# Altium PCB PCB1.PcbDoc
Units mm, origin at the board's own origin, x right, y up, seen from the top; angles counter-clockwise.
Board outline 97.28 x 72.31 mm, 2 copper layers (Top Layer, Bottom Layer); 65 components, 41 nets, 160 pads, 18 vias.
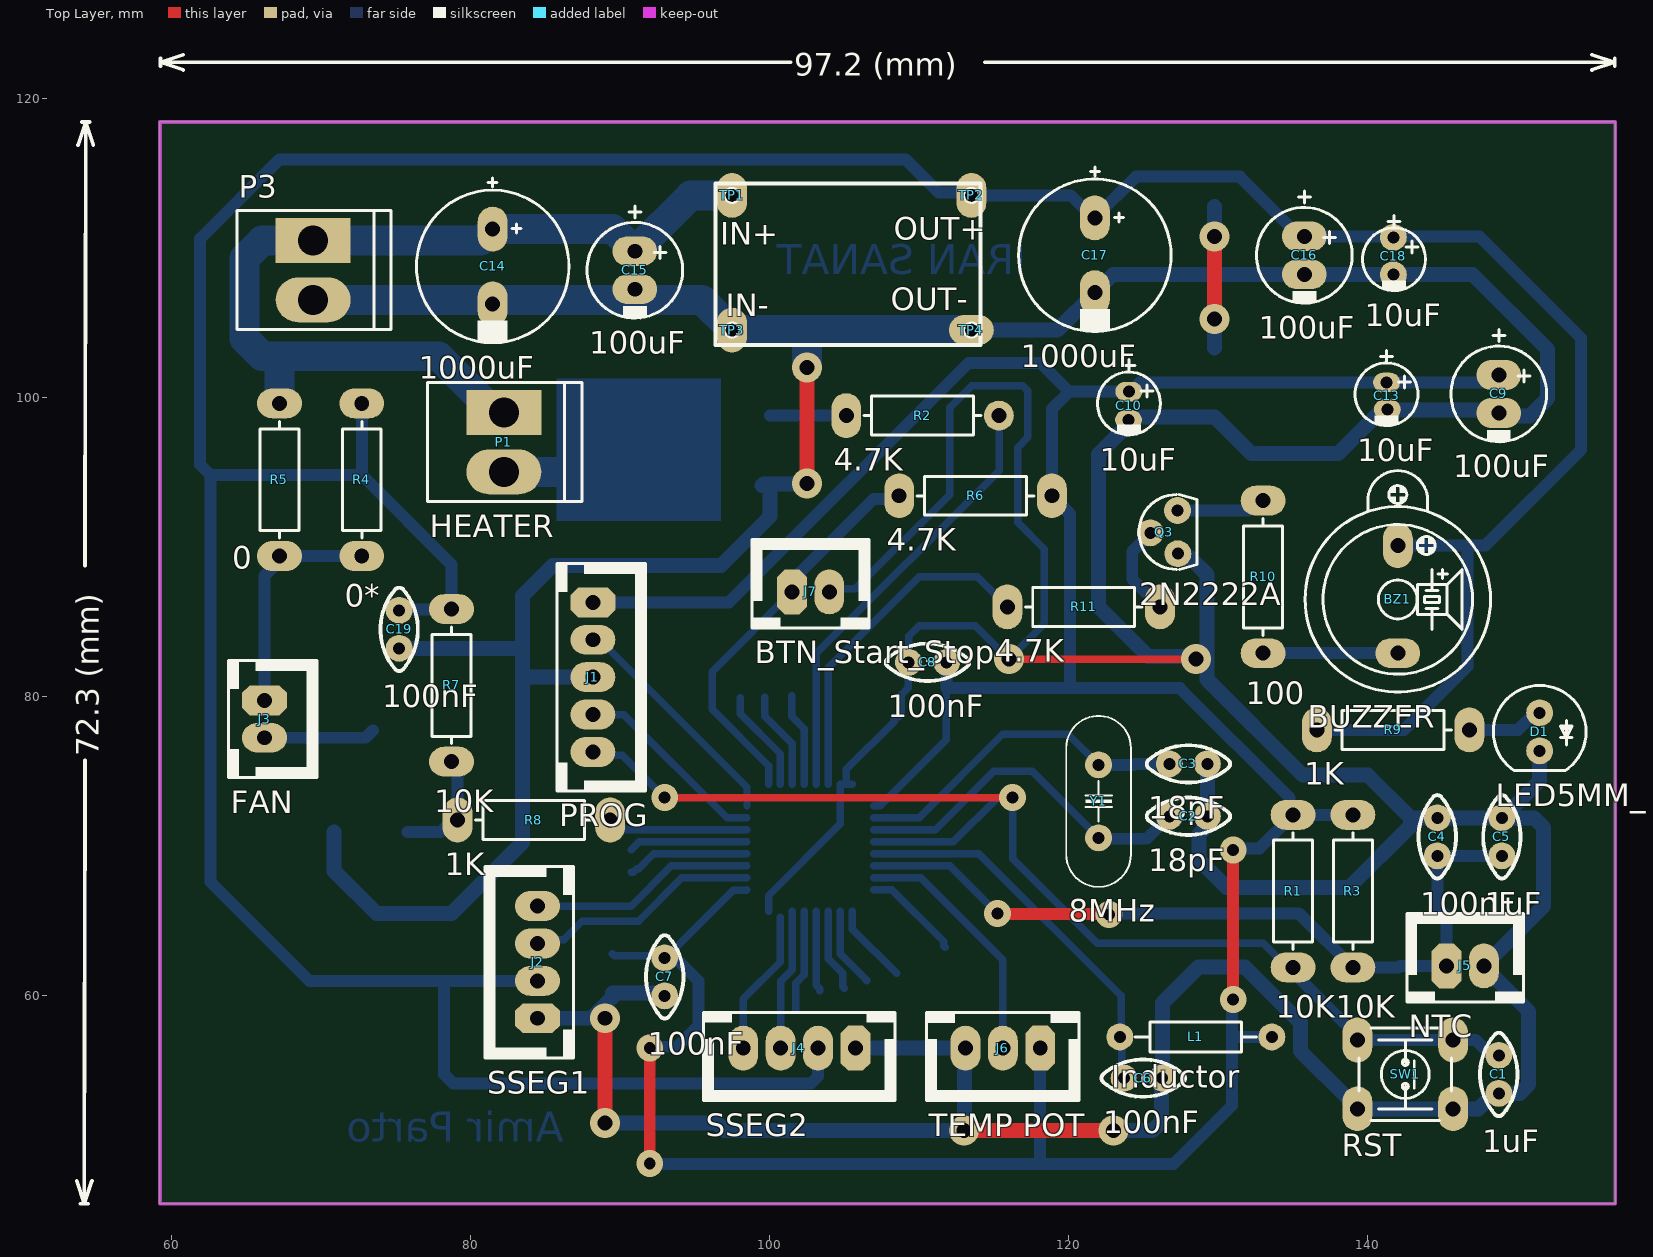
[diagram p0: Top Layer view]
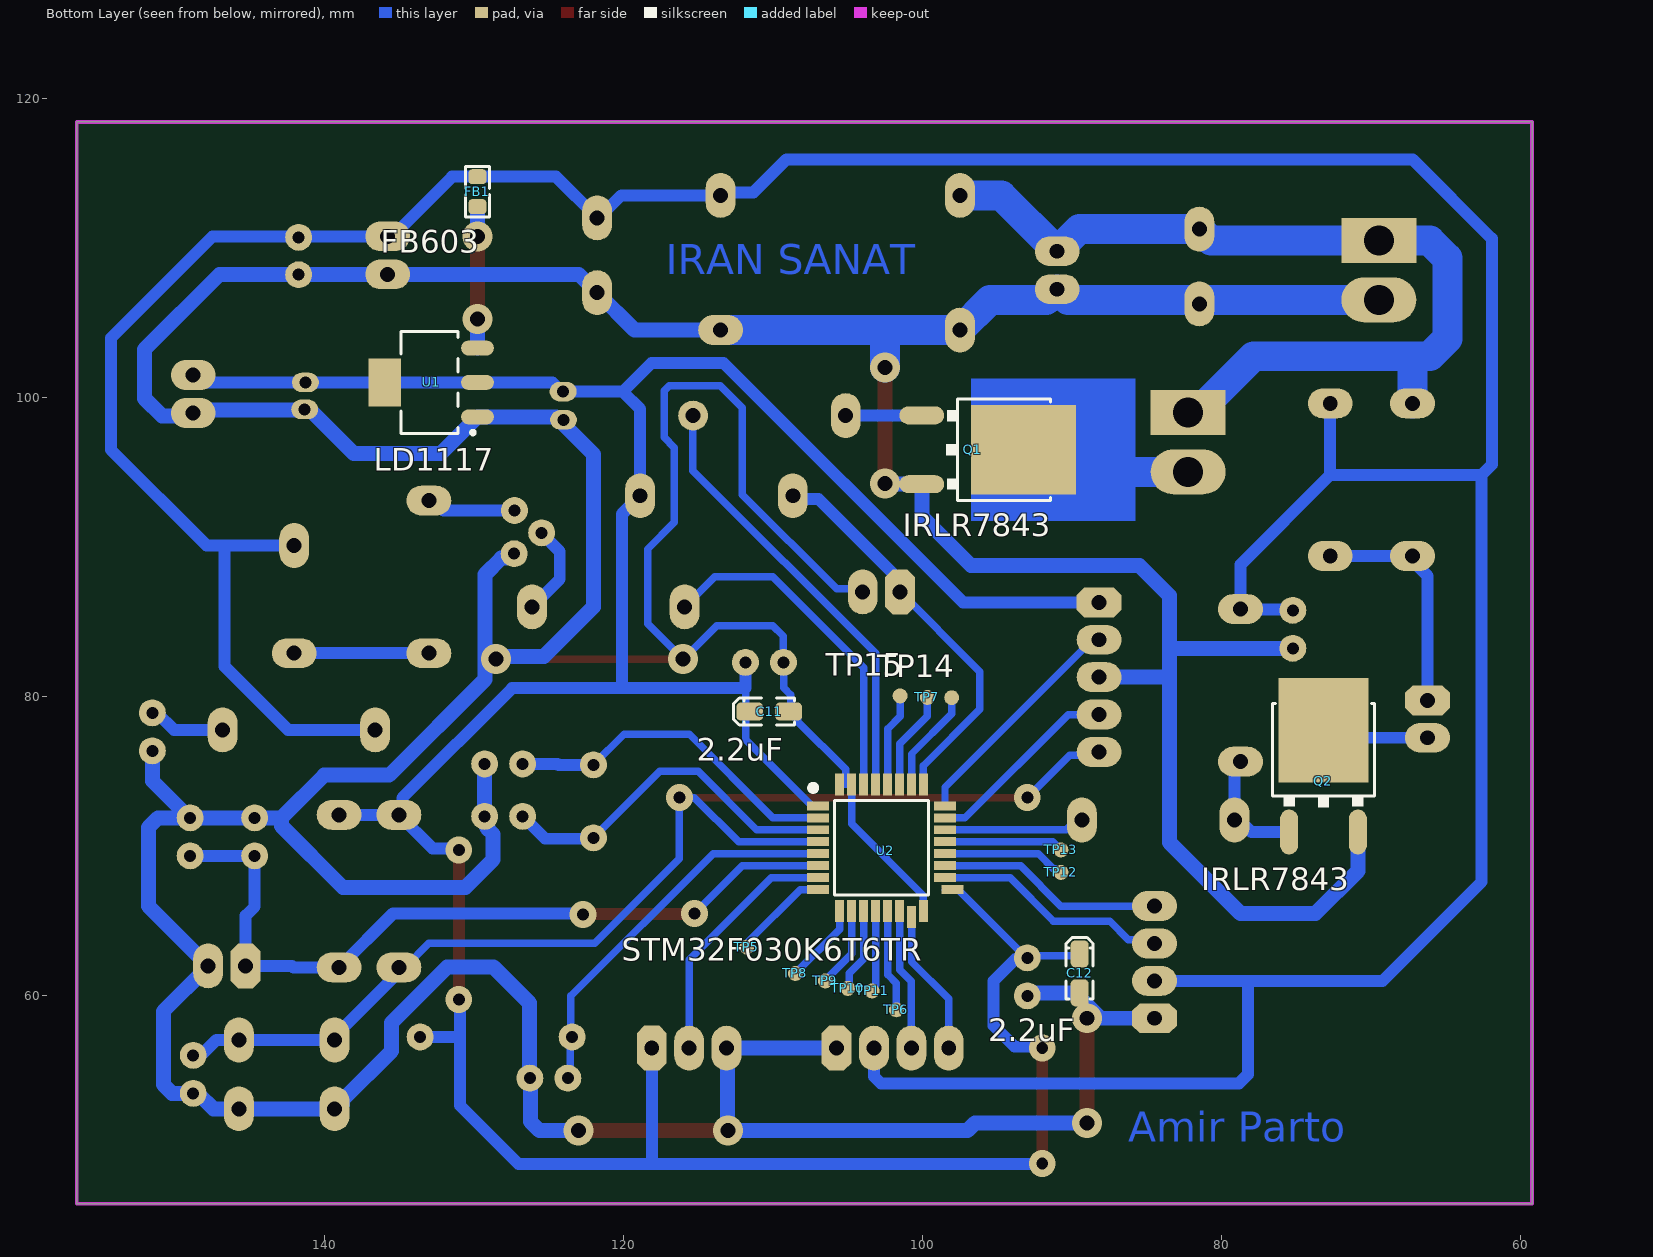
[diagram p1: Bottom Layer view, seen from below]
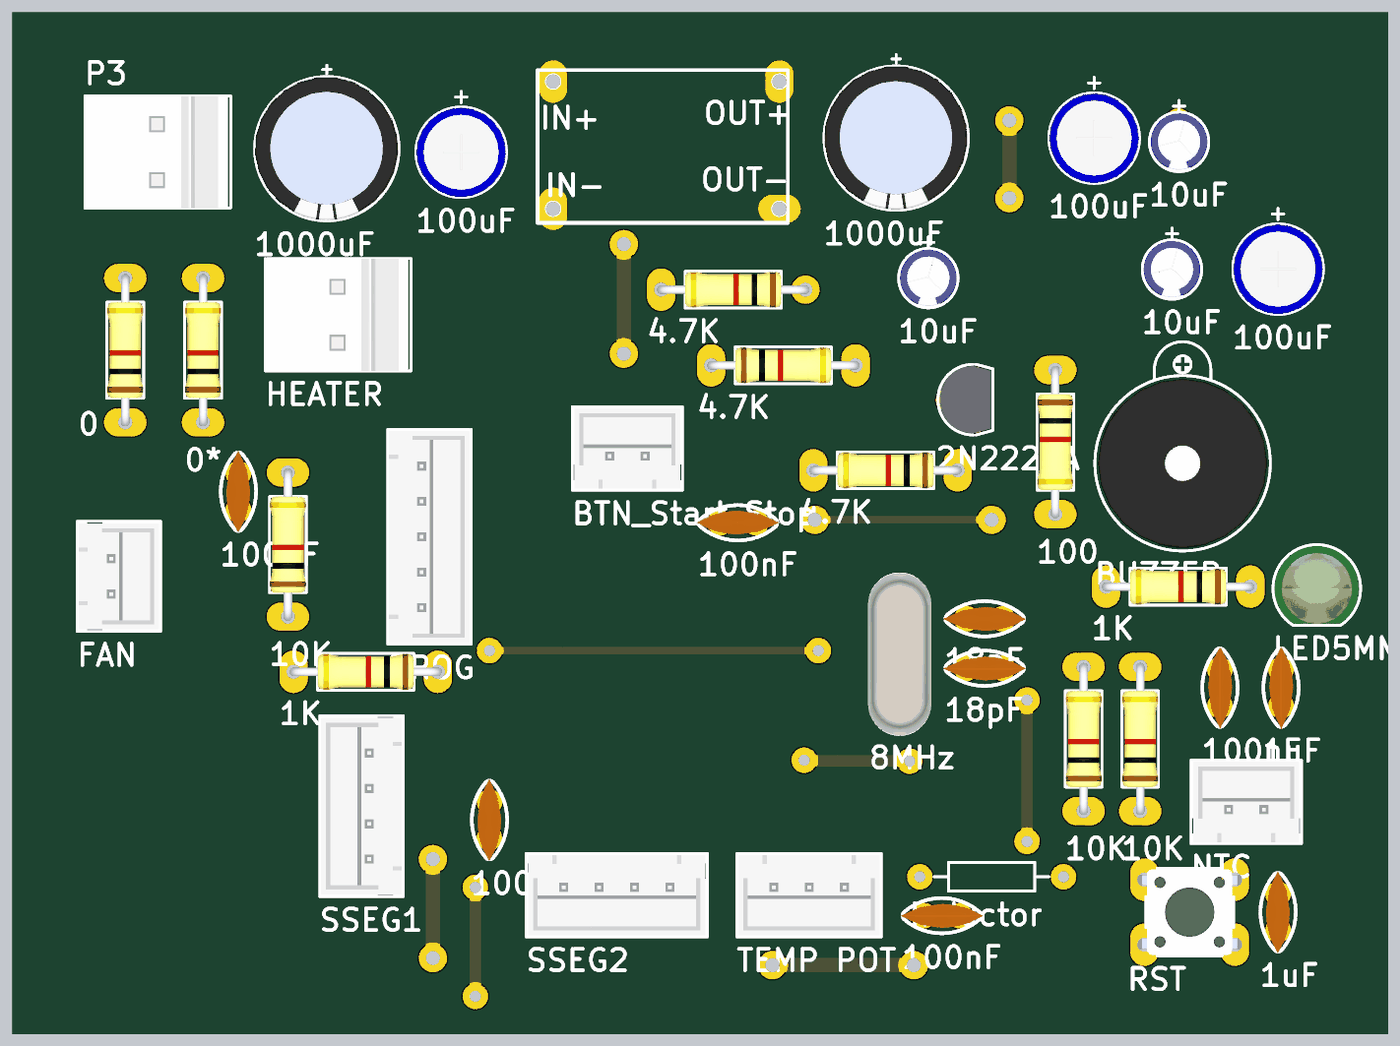
[diagram p2: 3D render of the assembled board from above, using the file's embedded part models]
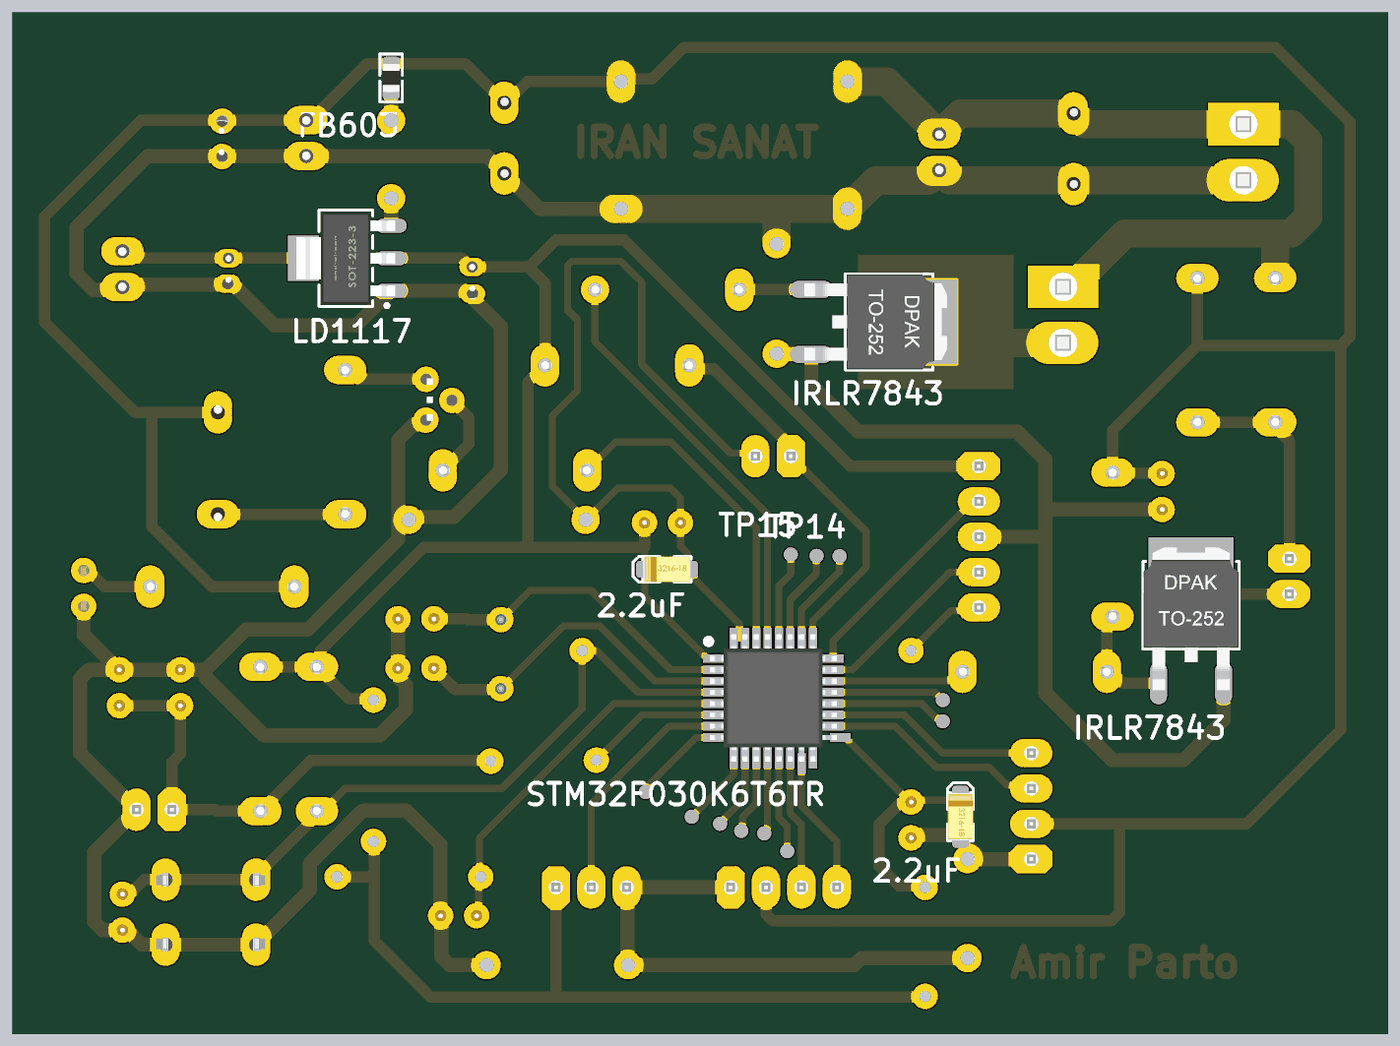
[diagram p3: 3D render of the assembled board from below, using the file's embedded part models]

## Layer stack, top to bottom
Top Solder: solder mask 0.0102, Solder Resist, Dk 3.5
Top Layer: signal copper 0.0356
Dielectric 1: dielectric 0.32, FR-4, Dk 4.8
Bottom Layer: signal copper 0.0356
Bottom Solder: solder mask 0.0102, Solder Resist, Dk 3.5

## Board outline
59.258,46.101 156.54,46.101 156.54,118.415 59.258,118.415

## Design rules (kind name [scope] priority, off if disabled: settings)
Clearance [All] p1: gap=0.4 ignorepadtopadclearanceinfootprint=TRUE except(0.25: Arc-SMDPad Track-SMDPad; 0.3: Arc-Arc Arc-Track Track-Track)
HoleSize [All] p1: absolutevalues=TRUE maxlimit=4 minlimit=0.8 maxpercent=80.000 minpercent=20.000
PolygonConnect [All] p1: connectstyle=Relief reliefconductorwidth=0.254 reliefentries=4 polygonreliefangle="90 Angle" airgapwidth=0.254
RoutingVias [All] p1: holewidth=0.8 width=1.3 viastyle="Through Hole" minholewidth=0.5 minwidth=0.5 maxholewidth=3 maxwidth=5
SolderMaskExpansion [All] p1: expansion=0.102 istentingtop=FALSE
UnRoutedNet [All] p1: checkbadconnections=TRUE
Width [All] p1: maxlimit=6 minlimit=0.254 preferedwidth=0.8 minimp=50.000000 maximp=50.000000 favimp=50.000000
28 further rules are at their usual default settings.

## Components (designator, comment, footprint, x,y, rotation, side; value= is the part's Value field where it differs from the comment)
BZ1 "BUZZER" BZ_C12 142,86.5 r270 top
C1 "1uF" "Cap - 100nF" 148.75,54.75 r270 top
C2 "18pF" "Cap - 100nF" 128,72 r0 top
C3 "18pF" "Cap - 100nF" 128,75.5 r0 top
C4 "100nF" "Cap - 100nF" 144.64,70.624 r90 top
C5 "1uF" "Cap - 100nF" 148.958,70.624 r90 top
C6 "100nF" "Cap - 100nF" 124.98,54.5 r0 top
C7 "100nF" "Cap - 100nF" 93,61.27 r270 top
C8 "100nF" "Cap - 100nF" 110.569,82.29 r180 top
C9 "100uF" C_EL_6X11 148.75,100.23 r270 top
C10 "10uF" C_EL_4X7#1 124.025,99.625 r270 top
C11 "2.2uF" C_TN_3216 110.25,79 r180 bottom
C12 "2.2uF" C_TN_3216 89.5,61.5 r270 bottom
C13 "10uF" C_EL_4X7#2 141.25,100.238 r270 top
C14 "1000uF" C_EL_10X12 81.5,108.75 r270 top
C15 "100uF" C_EL_6X11 91,108.5 r270 top
C16 "100uF" C_EL_6X11 135.75,109.5 r270 top
C17 "1000uF" C_EL_10X12 121.75,109.5 r270 top
C18 "10uF" C_EL_4X7#3 141.75,109.262 r270 top
C19 "100nF" "Cap - 100nF" 75.25,84.5 r270 top
D1 "LED5MM_GRN" LED5MM_GRN 151.486,77.648 r270 top
FB1 "FB603" L0805 129.75,113.75 r270 bottom
J1 "PROG" XH_5 88.2,81.3 r270 top value=XH_5
J2 "SSEG1" XH_4 84.5,62.25 r90 top value=HHDR_4
J3 "FAN" XH_2 66.25,78.5 r270 top value=HHDR_2
J4 "SSEG2" XH_4 102,56.5 r180 top value=HHDR_4
J5 "NTC" XH_2 146.5,62 r0 top value=HHDR_2
J6 "TEMP POT" XH_3 115.6,56.5 r180 top value=HHDR_3
J7 "BTN_Start_Stop" XH_2 102.75,87 r0 top value=HHDR_2
L1 "Inductor" AXIAL-0.4 128.5,57.25 r180 top value=10mH
P1 "HEATER" PWL_2 82.25,97 r270 top value=CONN_PWL_2
P3 "POWER-IN" PWL_2 69.5,108.5 r270 top value=CONN_PWL_2
Q1 "IRLR7843" DPAK_3 100.05,96.5 r270 bottom
Q2 "IRLR7843" DPAK_3 73.2,70.95 r180 bottom
Q3 "2N2222A" TO92_3 127,91 r90 top
R1 "10K" R025W_AX04#1 135,67 r90 top
R2 "4.7K" R025W_AX04#2 110.236,98.781 r180 top
R3 "10K" R025W_AX04#1 139,67 r90 top
R4 "0*" R025W_AX04#1 72.75,94.5 r90 top
R5 "0" R025W_AX04#1 67.25,94.5 r90 top
R6 "4.7K" R025W_AX04#1 113.775,93.425 r0 top
R7 "10K" R025W_AX04#1 78.75,80.75 r90 top
R8 "1K" R025W_AX04#1 84.25,71.75 r180 top
R9 "1K" R025W_AX04#1 141.687,77.775 r180 top
R10 "100" R025W_AX04#1 133,88 r270 top
R11 "4.7K" R025W_AX04#1 121,86 r180 top
SW1 "RST" SWPBT_SPDT_6X6X5 142.5,54.75 r180 top value=PUSHBUTTON
TP1 "IN+" TP80D50#1 97.5,113.5 r90 top value=VALUE
TP2 "OUT+" TP80D50#1 113.5,113.5 r90 top value=VALUE
TP3 "IN-" TP80D50#1 97.5,104.5 r90 top value=VALUE
TP4 "OUT-" TP80D50#2 113.5,104.5 r90 top value=VALUE
TP5 "" TP10 111.75,63.25 r90 bottom
TP6 "" TP10 101.749,59.066 r90 bottom
TP7 "" TP10 99.675,79.95 r90 bottom
TP8 "" TP10 108.5,61.5 r90 bottom
TP9 "" TP10 106.5,61 r90 bottom
TP10 "" TP10 105,60.5 r90 bottom
TP11 "" TP10 103.375,60.325 r90 bottom
TP12 "" TP10 90.75,68.25 r0 bottom
TP13 "" TP10 90.75,69.75 r0 bottom
TP14 "" TP10 98.05,79.925 r90 bottom
TP15 "" TP10 101.5,80.05 r90 bottom
U1 "LD1117" SOT223_4 132.95,101 r0 bottom
U2 "STM32F030K6T6TR" QFP80P900X900X160-32N 102.738,69.9 r180 bottom
Y1 "8MHz" "XTAL Small" 122,73 r90 top

## Footprints (in the part's own frame and the unit in brackets; to place one, negate y for a bottom-side part, rotate by r counter-clockwise, add the part's x,y. Pads: shape width x height; smd on the part's side, far side on the other; paste and mask are expansions set on the pad)
AXIAL-0.4 [mm] "Axial Device, Thru-Hole; 2 Leads; 0.4 in Pin Spacing"
  round 1.8 hole 0.8: 1(-5.08,0) 2(5.08,0)
  silkscreen extent -4.06,-1.02 4.06,1.02
BZ_C12 [mm] "BUZZER 12mm DIA, 8.5mm Height , 7.62mm pitch"
  oval 3x2 hole 1: 1(-3.6,0)
  oval 2x3 hole 1: 2(3.6,0)
  silkscreen extent -8.6,-6.2 6.2,6.2, body extent -6,-6 6,6, height 9.5
C_EL_4X7#1 [mm] "Cap Elec, D4.0X7.0H pitch: 1.5mm"
  oval 1.3x1.8 hole 0.8: 1(-0.762,0) 2(1.125,-0.025)
  silkscreen extent -2.9,-2.1 2.13,2.1, body extent -2,-2 2,2, height 1
C_EL_4X7#2 [mm] "Cap Elec, D4.0X7.0H pitch: 1.5mm"
  oval 1.3x1.8 hole 0.8: 1(-0.762,0) 2(1.038,0.05)
  silkscreen extent -2.9,-2.1 2.13,2.1, body extent -2,-2 2,2, height 1
C_EL_4X7#3 [mm] "Cap Elec, D4.0X7.0H pitch: 1.5mm"
  round 1.8 hole 0.8: 1(-1.438,-0.05) 2(1.062,-0.05)
  silkscreen extent -2.9,-2.1 2.13,2.1, body extent -2,-2 2,2, height 1
C_EL_6X11 [mm] "Cap Elec, D6.3X11.0H pitch: 2.5mm"
  oval 2x3 hole 1: 1(-1.27,0) 2(1.27,0)
  silkscreen extent -4.3,-3.2 3.2,3.2, body extent -3.17,-3.18 3.18,3.18, height 2.51
C_EL_10X12 [mm] "Cap Elec, D10.0X12.0H pitch: 5.0mm"
  oval 3x2 hole 1: 1(-2.5,0) 2(2.5,0)
  silkscreen extent -5.9,-5.1 5.1,5.1, body extent -5.07,-5.08 5.05,5.04, height 13.7
C_TN_3216 [mm] "CAPACITOR, TAN A, 1206P, 3.2x1.6mm"
  rrect50% 1.8x1.2 smd mask+0.075: 1(-1.3,0) 2(1.3,0)
  Top Layer pour cut-out: -0.762,0.9 0.762,0.9 0.762,-0.9 -0.762,-0.9
  silkscreen extent -2.4,-0.9 1.7,0.9, body extent -1.7,-0.9 1.7,0.9, height 1.7
"Cap - 100nF" [mm]
  round 1.8 hole 0.8: 1(-1.27,0) 2(1.27,0)
  silkscreen extent -2.78,-1.25 2.79,1.25, body extent -2.92,-0.86 2.92,0.83, height 6.92
DPAK_3 [mm] "D-PAK (TO-252), 3-Pads, Body 6.2x6.7mm"
  oval 1.2x3 smd: 1(-2.3,0) 3(2.3,0)
  rect 6x7 smd: 4(0,6.8)
  silkscreen extent -3.4,1.63 3.4,8.6, body extent -3.37,-0.5 3.37,9.6, height 2.37
L0805 [mm] "INDUCTOR, FERRITE BEAD, 0805, 2.0X1.3mm"
  rrect50% 1x1.2 smd mask+0.075: 1(-1,0) 2(1,0)
  Top Layer pour cut-out: -0.5,0.8 0.5,0.8 0.5,-0.8 -0.5,-0.8
  silkscreen extent -1.7,-0.8 1.7,0.8, body extent -1,-0.6 1,0.6, height 0.95
LED5MM_GRN [mm] "LED THD 5MM GREEN"
  round 1.8 hole 0.8: 1(-1.27,0) 2(1.27,0)
  silkscreen extent -3.1,-3.1 2.6,3.1, body extent -3,-3 2.5,3, height 9.14
PWL_2 [mm] "Connector; Header; 2 Position"
  rect 3x5 hole 2: 1(-1.98,0)
  oval 3x5 hole 2: 2(1.98,0)
  silkscreen extent -3.98,-5.1 3.96,5.21, body extent -3.96,-5 3.96,5, height 13.5
QFP80P900X900X160-32N [mm]
  rect 1.475x0.6 smd: 1(-4.238,2.8) 2(-4.238,2) 3(-4.238,1.2) 4(-4.238,0.4) 5(-4.238,-0.4) 6(-4.238,-1.2) 7(-4.238,-2) 8(-4.238,-2.8) 17(4.738,-2.8) 18(4.238,-2) 19(4.238,-1.2) 20(4.238,-0.4) 21(4.238,0.4) 22(4.238,1.2) 23(4.238,2) 24(4.238,2.8)
  rect 0.6x1.475 smd: 9(-2.8,-4.238) 10(-2,-4.238) 11(-1.2,-4.238) 12(-0.4,-4.238) 13(0.4,-4.238) 14(1.2,-4.238) 15(2,-4.636) 16(2.8,-4.238) 25(2.8,4.238) 26(2,4.238) 27(1.2,4.238) 28(0.4,4.238) 29(-0.4,4.238) 30(-1.2,4.238) 31(-2,4.238) 32(-2.8,4.238)
  silkscreen extent -4.77,-3.15 3.15,4.2, body extent -4.5,-4.5 4.5,4.5, height 1.6
R025W_AX04#1 [mm] "RESISTOR 1/4 WATT, AXIAL0.4"
  oval 2x3 hole 1: 1(-5.1,0) 2(5.1,0)
  silkscreen extent -3.9,-1.3 3.9,1.3, body extent -5.38,-1.28 5.38,1.28, height 2.6
R025W_AX04#2 [mm] "RESISTOR 1/4 WATT, AXIAL0.4"
  round 2 hole 1: 1(-5.1,0)
  oval 2x3 hole 1: 2(5.1,0)
  silkscreen extent -3.9,-1.3 3.9,1.3, body extent -5.38,-1.28 5.38,1.28, height 2.6
SOT223_4 [mm] "SOT223, 4-Leads, Body 6.5x3.5mm, Pitch 2.30mm"
  oval 2.2x1 smd: 1(-3.2,2.3) 2(-3.2,0) 3(-3.2,-2.3)
  rect 2.2x3.2 smd: 4(3,0)
  Top Layer pour cut-out: -1.7,3.556 1.7,3.556 1.7,-3.556 -1.7,-3.556
  silkscreen extent -3.02,-3.4 1.9,3.47, body extent -3.5,-3.25 3.5,3.25, height 1.7
SWPBT_SPDT_6X6X5 [mm] "SWITCH, PUSHBUTTON, THD, SPDT, 6X6mm"
  oval 2x3 hole 1 mask+0.1: 1(-3.2,2.3) 2(-3.2,-2.3) 3(3.2,-2.3) 4(3.2,2.3)
  silkscreen extent -3.1,-3.1 3.1,3.1, body extent -3.87,-3.01 3.87,3.02, height 5.01
TO92_3 [mm] "TO-92, SOT54"
  round 1.8 hole 0.8 mask+0.1: 1(-1.449,-0.298) 2(-0.053,1.543) 3(1.44,-0.277)
  silkscreen extent -2.5,-1.59 2.5,2.3, body extent -2.38,-1.45 2.38,2.18, height 4.82
TP10 [mm] "Round SMD Test Pin; 1.0 mm"
  round 1 smd: 1(0,0)
TP80D50#1 [mm]
  oval 3x2 hole 1 mask+0.025: 1(0,0)
  silkscreen extent -0.5,-0.5 0.5,0.5
TP80D50#2 [mm]
  oval 2x3 hole 1 mask+0.025: 1(0,0)
  silkscreen extent -0.5,-0.5 0.5,0.5
XH_2 [mm] "PW10-xx-M, JST-BxB-XH-A pitch: 2.5mm"
  oct 2x3 hole 1: 1(-1.25,0)
  oval 2x3 hole 1: 2(1.25,0)
  silkscreen extent -3.9,-2.4 3.9,3.5, body extent -3.75,-2.3 3.75,3.4, height 7
XH_3 [mm] "PW10-xx-M, JST-BxB-XH-A pitch: 2.5mm"
  oct 2x3 hole 1: 1(-2.5,0)
  oval 2x3 hole 1: 2(0,0) 3(2.5,0)
  silkscreen extent -5.1,-2.4 5.1,3.5, body extent -5,-2.3 5,3.4, height 7
XH_4 [mm] "PW10-xx-M, JST-BxB-XH-A pitch: 2.5mm"
  oct 2x3 hole 1: 1(-3.75,0)
  oval 2x3 hole 1: 2(-1.25,0) 3(1.25,0) 4(3.75,0)
  silkscreen extent -6.4,-2.4 6.4,3.5, body extent -6.25,-2.3 6.25,3.4, height 7
XH_5 [mm] "PW10-xx-M, JST-BxB-XH-A pitch: 2.5mm"
  oct 2x3 hole 1: 1(-5,0)
  oval 2x3 hole 1: 2(-2.5,0) 3(0,0) 4(2.5,0) 5(5,0)
  silkscreen extent -7.6,-2.4 7.6,3.5, body extent -7.5,-2.3 7.5,3.4, height 7
"XTAL Small" [mm]
  round 1.8 hole 0.8: 1(-2.44,0) 2(2.44,0)
  silkscreen extent -5.71,-2.16 5.71,2.16, body extent -5.75,-2.25 5.75,2.25, height 3.56

## Part data
BZ1: library part BUZZER_C12, "Buzzer, 12X8.5mm, Magnetic Transducer", MANF="Buerklin, CUI", MANF_P#="CM12P, MT03-H1BHP, BMT1205XH7.5, CEM-1201(50)", PARAM="2048 ±200 Hz", PARAM2=3~7VCC, PRICE=PRICE
C1 C2 C3 C4 C5 C6 C7 C8 C19: library part Cap-Bipolar, "Bipolar Capacitor", Voltage=100V, Adding Date=1387/12/20, Designer="Saeid Jorablo", Organazation=ControTec
C9 C15 C16: library part CAP_THD_EL, "CAP, THD, ELEC,", ASSEMBLY=ASSEMBLY, DESC=DESCRIPTION, DIST#=MOUSER, MANF=MANF, MANF_P#=MANF_PART#, PARAM=20%, PARAM2=25V, PRICE="10= 5$"
C10 C13 C18: library part CAP_THD_EL_4X7, "CAP, THD, ELEC,", ASSEMBLY=ASSEMBLY, DESC=DESCRIPTION, DIST#=MOUSER, MANF=MANF, MANF_P#=MANF_PART#, PARAM=20%, PARAM2=25V, PRICE="10= 5$"
C11 C12: library part CAP_SMD_TAN, "CAP, SMD, TAN,", PARAM2=-V
C14 C17: library part CAP_THD_EL_10X12, "CAP, THD, ELEC,", ASSEMBLY=ASSEMBLY, DESC=DESCRIPTION, DIST#=MOUSER, MANF=MANF, MANF_P#=MANF_PART#, PARAM=20%, PARAM2=25V, PRICE="10= 5$"
D1: library part LED_THD_5MM_GRN, "LED, THD, 5MM, GREEN", ASSEMBLY=ASSEMBLY, DESC=DESCRIPTION, MANF=MANF, MANF_P#=MANF_PART#, PARAM2=2.2V, PRICE=PRICE
FB1: library part FBEAD_SMD, "FERRITE_Bead, SMD", MANF=MURATA, MANF_P#=BLM15AG121SN1D, PARAM=120@100MHz, PARAM2=1A
J1: library part XH_5, "JST-XH pitch: 2.5mm", MANF=JST, MANF_P#=JST-B5B-XHA
J2 J4: library part XH_4, "JST-XH pitch: 2.5mm"
J3 J5 J7: library part XH_2, "JST-XH pitch: 2.5mm"
J6: library part XH_3, "JST-XH pitch: 2.5mm"
P1 P3: library part CONN_PWL_2, "Power Terminal 2pin,Header, 2-Pin"
Q1 Q2: library part MOSN_IRLR7843_DPAK, "HEXFET Power MOSFET", ASSEMBLY=ASSEMBLY, MANF_P#=IRLR7843
Q3: library part NPN_2N2222A_TO92, "BJT, NPN, 40v, 0.6A, THD, TO92", MANF=DIOTEC, MANF_P#=2N2222A, PARAM="0.6A, hFE100~300", PARAM2="40v, 625mW"
R1 R2 R3 R4 R5 R6 R7 R8 R9 R10 R11: library part RES_THD, "RESISTOR, THD", ASSEMBLY=ASSEMBLY, DESC=DESCRIPTION, DIST#=MOUSER, MANF="KOA SPEER", MANF_P#=RK73H1ETTP4701F, PARAM=0.063W, PARAM2=1%, PRICE="100= 0.5$"
SW1: library part SWPBT_SPDT_6X6X5, "SWITCH, PUSH BUTTON, TACTILE, THD, SPDT, 4X4MM", ASSEMBLY=ASSEMBLY, DESC=DESCRIPTION, MANF=-, MANF_P#=-, PARAM=PARAM, PRICE=PRICE
TP1 TP2 TP3 TP4: library part TESTPOINT_PROBE, "TEST POINT", MANF=MANF, MANF_P#=MANF_P#
TP5 TP6 TP7 TP8 TP9 TP10 TP11 TP12 TP13 TP14 TP15: library part "Test Point", "Test Point", Category=MISC, Company="SJ Libraries", ComponentLink1Description=Datasheet, Designer="Eng. Saeid Jorablo", HelpURL=http://s3.picofile.com/file/7443264187/Coming_Soon_logo.gif, Mounting Technology="Surface Mount\Through-Hole", Pin Count=0, Update Date=6/3/2012
U1: library part VREG_1117_SOT223, "REG, Linear, LDO1V, 0.8A, SOT-223", MANF="TI, ON, ST", MANF_P#="LD1117, LM1117, AMS1117, TLV1117, REG1117, NCP1117, LT1117, SPX1117", PARAM="LDO1V, 0.8A", PARAM2=1.2/1.5/1.8/2.5/2.85/3.3/5V
U2: "Integrated Circuit", Manufacturer_Name=STMicroelectronics, Mouser Part Number=511-STM32F030K6T6TR, Arrow Part Number=STM32F030K6T6TR, Arrow Price/Stock=https://www.arrow.com/en/products/stm32f030k6t6tr/stmicroelectronics, Datasheet Link=http://www.st.com/content/ccc/resource/technical/document/datasheet/a4/5d/0b/0e/87/c4/4d/71/DM00088500.pdf/files/DM00088500.pdf/jcr:content/translations/en.DM00088500.pdf, Height=1.6mm, Manufacturer_Part_Number=STM32F030K6T6TR, Mouser Price/Stock=https://www.mouser.co.uk/ProductDetail/STMicroelectronics/STM32F030K6T6TR?qs=9MuLHSklicort60U4QZudQ%3D%3D
Y1: library part XTAL, "XTAL Crystal", Company=E.P.I.L, Design Date=11/04/2011
L1: Code_IEC=1005, Code_JEITA=0402, LatestRevisionDate=29-May-2009, LatestRevisionNote="IPC-7351 Footprint Added.", PackageDescription="Chip Inductor", PackageReference=0402-A, Published=8-Jun-2000, Publisher="Altium Limited"

## Via types
v1: diameter 2, hole 1, Top Layer to Bottom Layer, 10 vias
v2: diameter 1.8, hole 0.8, Top Layer to Bottom Layer, 8 vias

## Nets (pads, with @x,y where several pads share a name; then routed paths per layer and width w, separated by ;. In a path a pad name is that pad's centre, name@x,y a point inside that pad or via, vN(x,y) a via of type N, cw(c..) or ccw(c..) an arc to the next point about the centre after c; other vN are vias at no path point)
+3.3V: C7.1 C8.1 C9.1 C10.1 C11.1 C12.1 C13.1 J1.1 J6.1 L1.1 R1.2 R3.2 R6.2 U1.2 U1.4 U2.1 U2.17 | length 234.3
  Top Layer w0.8: v2(91.999,48.793) v2(92,56.5) ; v2(131,59.75) v2(131,69.75)
  Bottom Layer w0.5: C12.1 89.63,62.67 92.87,62.67 C7.1 ; C7.1@93.064,62.54 97.574,67.05 98.45,67.05 U2.17@98.5,67.1 ; U2.1 107.414,72.7 111.825,77.111 111.825,79 111.825,80.475 111.875,80.525 ; C8.1@111.819,82.29 C8.1@111.819,82.779
  Bottom Layer w0.8: J1.1 97.3,86.3 113.311,102.311 118.11,102.311 120.034,100.387 ; v2(91.999,48.793) 92.042,48.75 118.25,48.75 ; v2(92,56.5) 92.096,56.596 93.846,56.596 95.25,58 95.25,61 93.8,62.45 93.09,62.45 C7.1 ; 111.839,80.561 C8.1 ; 111.875,80.525 111.912,80.562 120.091,80.562 ; J6.1 118.1,48.9 118.25,48.75 ; v2(131,59.75) 130.93,59.68 130.93,57.25 ; v2(131,69.75) 131.096,69.846 132.746,69.846 R1.2 ; L1.1 130.93,57.25 ; R3.2 R1.2 ; C9.1 148.425,101.5 147.925,101 C13.1 U1.4 U1.2 124.746,101 124.133,100.387 C10.1 120.034,100.387 ; 118.25,48.75 127,48.75 130.93,52.68 130.93,57.25 ; 120.034,100.387 118.875,99.228 R6.2 120.091,92.209 120.091,80.562 ; 120.091,80.562 127.438,80.562 134.77,73.23 134.77,72.33 R1.2
+5V: BZ1.1 C16.1 C17.1 C18.1 C19.1 FB1.1 J2.2 J4.2 R4.2 R7.2 R9.2 TP2.1 | length 275
  Bottom Layer w0.8: R4.2 72.75,94.825 ; C19.1 75.29,85.81 78.71,85.81 R7.2 78.75,88.825 72.75,94.825 ; J2.2 78.25,61 ; J4.2 103.25,54.621 102.781,54.153 78.847,54.153 78.25,54.75 78.25,61 ; C16.1@135.425,110.77 131.445,114.75 124.5,114.75 C17.1 121.639,112 120.139,113.5 TP2.1 113.3,113.7 111.3,113.7 109.1,115.9 67.234,115.9 61.951,110.617 61.951,95.499 62.625,94.825 ; C16.1 147.446,110.77 154.25,103.966 154.25,96.5 147.85,90.1 146.66,90.1 ; R9.2 142.418,77.775 146.66,82.017 146.66,90.1 ; BZ1.1 146.66,90.1 ; 62.625,94.825 72.75,94.825 ; 62.625,94.825 62.625,67.625 69.25,61 78.25,61
+12V: C14.1 C15.1 P1.1 P3.1 R5.2 TP1.1 | length 63.6
  Bottom Layer w2: R5.2 67.25,102.5 67.5,102.75 ; P1.1 81.65,98.98 77.88,102.75 67.5,102.75 ; TP1.1 94.73,113.5 C15.1 89.52,111.25 C14.1 80.73,110.48 66.094,110.48 64.922,109.308 64.922,103.922 66.094,102.75 67.5,102.75
BTN_Start_Stop: J7.1 R6.1 U2.25 | length 27.2
  Bottom Layer w0.5: U2.25 99.938,75.387 96.175,79.15 96.175,81.675 J7.1@101.7,87.2
  Bottom Layer w0.8: J7.1 101.834,87.334 101.834,88.084 106.945,93.195 108.445,93.195 R6.1
Buzzer: R11.2 U2.30 | length 23.1
  Bottom Layer w0.5: U2.30 103.938,81.938 110,88 113.9,88 R11.2
FAN: R8.1 U2.22 | length 9.4
  Bottom Layer w0.5: R8.1 89.756,71.75 90.406,71.1 U2.22
GND: C1.2 C2.2 C3.2 C4.2 C5.2 C6.2 C7.2 C8.2 C9.2 C10.2 C11.2 C12.2 C13.2 C14.2 C15.2 C16.2 C17.2 C18.2 C19.2 D1.2 J1.3 J2.1 J4.1 J5.2 J6.3 J7.2 P3.2 Q1.3 Q2.3 Q3.1 SW1.1 SW1.4 TP3.1 TP4.1 U1.1 U2.16 U2.31 U2.32 | length 504.2
  Top Layer w0.5: v1(116,82.5) v1(128.5,82.5)
  Top Layer w1: v1(89,51.5) v1(89,58.5) ; v1(102.5,94.25) v1(102.5,102) ; v1(113,51) v1(123,51)
  Bottom Layer w0.5: U2.16 99.938,66.688 104.738,71.488 U2.31 105.138,74.138 ; J7.2 104.208,87.208 105.75,87.208 112.039,93.497 112.039,99.314 113.513,100.787 116.942,100.787 117.272,100.457 117.272,97.333 116.586,96.647 116.586,91.643 118.364,89.865 118.364,84.864 v1(116,82.5) 113.75,84.75 110,84.75 109.299,84.049 C8.2 ; U2.32 105.138,74.138 ; C8.2@109.29,82.29 109.29,80.592 108.807,80.109 108.807,78.807 108.656,78.656 108.333,78.656 108.331,78.654 108.331,78.331 105.138,75.138 105.138,74.138 ; v1(128.5,82.5) v1@129,83
  Bottom Layer w1: Q2.3 70.9,68.35 73.75,65.5 78.75,65.5 83.5,70.25 83.5,81.3 ; C19.2 83.5,83.23 ; J2.1 88.1,58.5 89.5,59.9 C12.2 92.663,60.2 92.863,60 C7.2 ; J1.3 83.5,81.3 ; v1(89,51.5) 96.5,51.5 97,51 v1(113,51) 113.05,51.05 113.05,56.45 J6.3 J4.1 ; v1(102.5,94.25) 102.475,94.225 100.075,94.225 Q1.3 99.592,94.2 99.5,94.108 100.05,94.108 100.05,92.05 96.75,88.75 85.5,88.75 83.5,86.75 83.5,83.23 ; TP4.1 119.25,104.5 C17.2 122.98,108.23 C16.2 146.98,108.23 152,103.21 152,99.922 150.828,98.75 148.96,98.75 C9.2 148.567,99.143 141.357,99.143 C13.2 140.974,99.2 138.02,96.246 132.204,96.246 U1.1 124.5,98.7 122,96.2 122,86 125.309,82.691 v1@128.229,82.691 ; v1(123,51) 125.613,51 126.198,51.586 126.198,54.448 C6.2 ; C6.2@126.27,54.5 126.27,59.52 128.675,61.925 131.775,61.925 135.5,58.2 135.5,56.3 138.785,53.015 138.785,52.727 SW1.4@139.012,52.5 ; Q3.1 127.583,89.551 127.884,89.25 128.164,89.25 129.25,88.164 v1@129.25,83 ; v1@128.5,83 v1@129.25,83 ; C2.2@129.27,71.784 C3.2 ; C2.2 129.117,71.847 129.117,71.217 128.7,70.8 128.7,69.108 130.558,67.25 138.75,67.25 142.856,71.356 142.856,71.894 ; SW1.4 SW1.1 147.398,52.45 148.376,53.428 148.698,53.428 C1.2 150.164,53.48 150.75,54.066 150.75,58.964 147.75,61.964 J5.2 151.75,66 151.75,71.25 151.106,71.894 C5.2@149.008,71.894 ; D1.2 151.486,74.372 C5.2@149.008,71.894 ; 83.5,81.3 83.5,83.23 ; v1@129.25,83 129.25,81.15 135.65,74.75 140,74.75 142.856,71.894 ; 142.856,71.894 C4.2 C5.2 C5.2@149.008,71.894
  Bottom Layer w2: P3.2 90.29,106.52 C15.2 91.73,106.5 95.5,106.5 TP3.1 102.5,104.5 ; v1(102.5,102) 102.5,104.5 ; TP4.1 102.5,104.5
Heater: R2.1 U2.29 | length 29.9
  Bottom Layer w0.5: U2.29 103.138,82.888 115.35,95.1 R2.1@115.35,99
NetBZ1_2: BZ1.2 R10.2 | length 9.2
  Bottom Layer w0.8: R10.2 141.175,82.9 141.675,82.4 BZ1.2@142,82.4
NetC2_1: C2.1 U2.3 Y1.1 | length 23.9
  Bottom Layer w0.5: U2.3 111.1,71.1 115,75 117.56,75 Y1.1@122,70.56
  Bottom Layer w0.8: Y1.1 122.06,70.5 125.23,70.5 C2.1
NetC3_1: C3.1 U2.2 Y1.2 | length 23
  Bottom Layer w0.5: U2.2 110,71.9 115.6,77.5 119.94,77.5 Y1.2
  Bottom Layer w0.8: Y1.2 124.333,75.44 124.393,75.5 C3.1
NetC6_1: C6.1 L1.2 U2.5 | length 26.1
  Bottom Layer w0.5: U2.5 114,69.5 123.5,60 L1.2@123.5,57 ; L1.2@123.563,57.107 123.563,54.647 C6.1
NetD1_1: D1.1 R9.1 | length 5.2
  Bottom Layer w0.8: R9.1 150.034,77.775 151.177,78.918 D1.1
NetFB1_2: FB1.2 U1.3 | length 9.4
  Top Layer w1: v1(129.75,105.25) v1(129.75,110.75)
  Bottom Layer w1: U1.3 v1(129.75,105.25) ; v1(129.75,110.75) FB1.2
NetJ3_1: J3.1 R4.1 R5.1 | length 15.6
  Bottom Layer w0.8: J3.1 66.25,88.075 67.25,89.075 R5.1 R4.1
NetJ3_2: J3.2 Q2.4 | length 7.5
  Bottom Layer w0.8: J3.2 73,77.25 Q2.4@73.5,77.75
NetP1_2: P1.2 Q1.4 | length 11.6
  Bottom Layer w2: P1.2 91.77,95.02 Q1.4
NetQ1_1: Q1.1 R2.2 | length 5.1
  Bottom Layer w0.8: Q1.1 R2.2@105.117,98.8
NetQ2_1: Q2.1 R7.1 R8.2 | length 7.7
  Bottom Layer w0.8: Q2.1@75.8,70.95 78.025,70.95 78.825,71.75 R8.2 79.15,74.925 78.75,75.325 R7.1
NetQ3_2: Q3.2 R11.1 | length 6.2
  Bottom Layer w0.8: Q3.2 125.457,90.908 124.25,89.701 124.25,87.85 R11.1
NetQ3_3: Q3.3 R10.1 | length 6
  Bottom Layer w0.8: Q3.3 132.015,92.44 132.675,93.1 R10.1
NetTP5_1: TP5.1 U2.8 | length 6.5
  Bottom Layer w0.5: U2.8 108.185,67.1 111.654,63.631 111.654,63.346 TP5.1
NetTP6_1: TP6.1 U2.13 | length 6.8
  Bottom Layer w0.5: TP6.1 101.749,60.835 102.338,61.424 U2.13
NetTP7_1: TP7.1 U2.27 | length 6.6
  Bottom Layer w0.5: TP7.1 99.7,79.925 99.7,78.7 101.538,76.862 U2.27
NetTP8_1: TP8.1 U2.9 | length 5.4
  Bottom Layer w0.5: U2.9 105.538,64.462 TP8.1
NetTP9_1: TP9.1 U2.10 | length 5.4
  Bottom Layer w0.5: U2.10 104.738,62.808 106.5,61.046 TP9.1
NetTP10_1: TP10.1 U2.11 | length 5.6
  Bottom Layer w0.5: U2.11 103.938,62.476 104.904,61.51 104.904,60.596 TP10.1
NetTP11_1: TP11.1 U2.12 | length 5.4
  Bottom Layer w0.5: U2.12 103.138,60.697 103.375,60.46 TP11.1
NetTP12_1: TP12.1 U2.20 | length 8.3
  Bottom Layer w0.5: TP12.1 90.885,68.25 91.135,68.5 91.25,68.5 92.25,69.5 U2.20
NetTP13_1: TP13.1 U2.21 | length 8
  Bottom Layer w0.5: TP13.1 91.3,70.3 U2.21
NetTP14_1: TP14.1 U2.26 | length 6.9
  Bottom Layer w0.5: TP14.1 98.05,78.85 100.738,76.162 U2.26
NetTP15_1: TP15.1 U2.28 | length 6.3
  Bottom Layer w0.5: TP15.1 101.5,78.675 102.338,77.837 U2.28
NRST: C1.1 J1.5 R1.1 SW1.2 SW1.3 U2.4 | length 81.6
  Top Layer w0.5: v2(93,73.25) v2(116.25,73.25)
  Bottom Layer w0.5: J1.5 88.416,76.084 90.166,76.084 v2(93,73.25) ; U2.4 112.3,70.3 115.25,73.25 v2(116.25,73.25) 116.25,69.17 121.92,63.5 132.994,63.5 134.594,61.9 R1.1
  Bottom Layer w0.8: R1.1 135,61.575 138.747,57.828 138.747,57.42 139.116,57.05 SW1.2@145.029,57.05 ; SW1.2 147.207,57.05 148.147,56.11 148.66,56.11 C1.1
NTC: C4.1 C5.1 J5.1 R3.1 U2.6 | length 53.1
  Top Layer w0.8: v2(115.25,65.5) 115.285,65.465 122.673,65.465 v2(122.707,65.43)
  Bottom Layer w0.5: U2.6 112.05,68.7 v2(115.25,65.5)
  Bottom Layer w0.8: v2(122.707,65.43) 122.777,65.5 135.4,65.5 R3.1 142.062,61.9 142.162,62 J5.1 145.25,65.354 144.64,65.964 C4.1 C5.1
SSEG1_CLK: J2.4 U2.19 | length 15.1
  Bottom Layer w0.5: J2.4 90.75,66 93.45,68.7 U2.19
SSEG1_Data: J2.3 U2.18 | length 15.8
  Bottom Layer w0.5: J2.3 84.75,63.75 86.25,63.75 87.5,65 91.25,65 94.15,67.9 U2.18
SSEG2_CLK: J4.4 U2.15 | length 9.8
  Bottom Layer w0.5: J4.4 98.25,59.796 100.738,62.284 U2.15@100.738,65.253
SSEG2_Data: J4.3 U2.14 | length 9.5
  Bottom Layer w0.5: J4.3 100.749,60.966 101.538,61.755 U2.14
SWCLK: J1.2 U2.24 | length 15.6
  Bottom Layer w0.5: J1.2 88.606,83.8 89.123,83.283 89.158,83.283 98.5,73.941 U2.24
SWDIO: J1.4 U2.23 | length 13.2
  Bottom Layer w0.5: J1.4 90.262,78.8 97.162,71.9 U2.23
Temp_Pot: J6.2 U2.7 | length 16.8
  Bottom Layer w0.5: U2.7 110.1,67.9 115.6,62.4 J6.2

## Keep-outs
Keep-Out Layer:
  the board outline again, w0.254

## Other copper
Bottom Layer:
  rectangle net NetP1_2: 85.75,91.75 96.75,101.25
  text "IRAN SANAT" at 117.154,108.247 h2
  text "Amir Parto" at 86.242,50.233 h2

## Silkscreen, mask and mechanical layers (free items; w line width, h text height)
Top Overlay:
  lines w0.254: 53.694,47.625 54.2,46.1 ; 53.79,116.877 54.3,118.4 ; 53.946,46.1 54.454,46.1 ; 54.046,118.4 54.554,118.4 ; 54.241,75.75 54.2,46.1 ; 54.259,88.75 54.3,118.4 ; 54.71,47.623 54.2,46.1 ; 54.806,116.875 54.3,118.4 ; 59.3,122.146 59.3,122.654 ; 60.824,121.892 59.3,122.4 ; 60.824,122.908 59.3,122.4 ; 101.4,122.4 59.3,122.4 ; 114.4,122.4 156.5,122.4 ; 154.976,121.892 156.5,122.4 ; 154.976,122.908 156.5,122.4 ; 156.5,122.146 156.5,122.654 ; 96.4,103.5 96.4,114.3 114.1,114.3 114.1,103.5 96.4,103.5
  text "97.2 (mm)" at 101.654,121.486 h1.52
  text "72.3 (mm)" at 55.156,76.002 h1.52 r89.92